# EAGLE board SD_MMC Breakout-Panel-v21 (EAGLE 6.5.0)
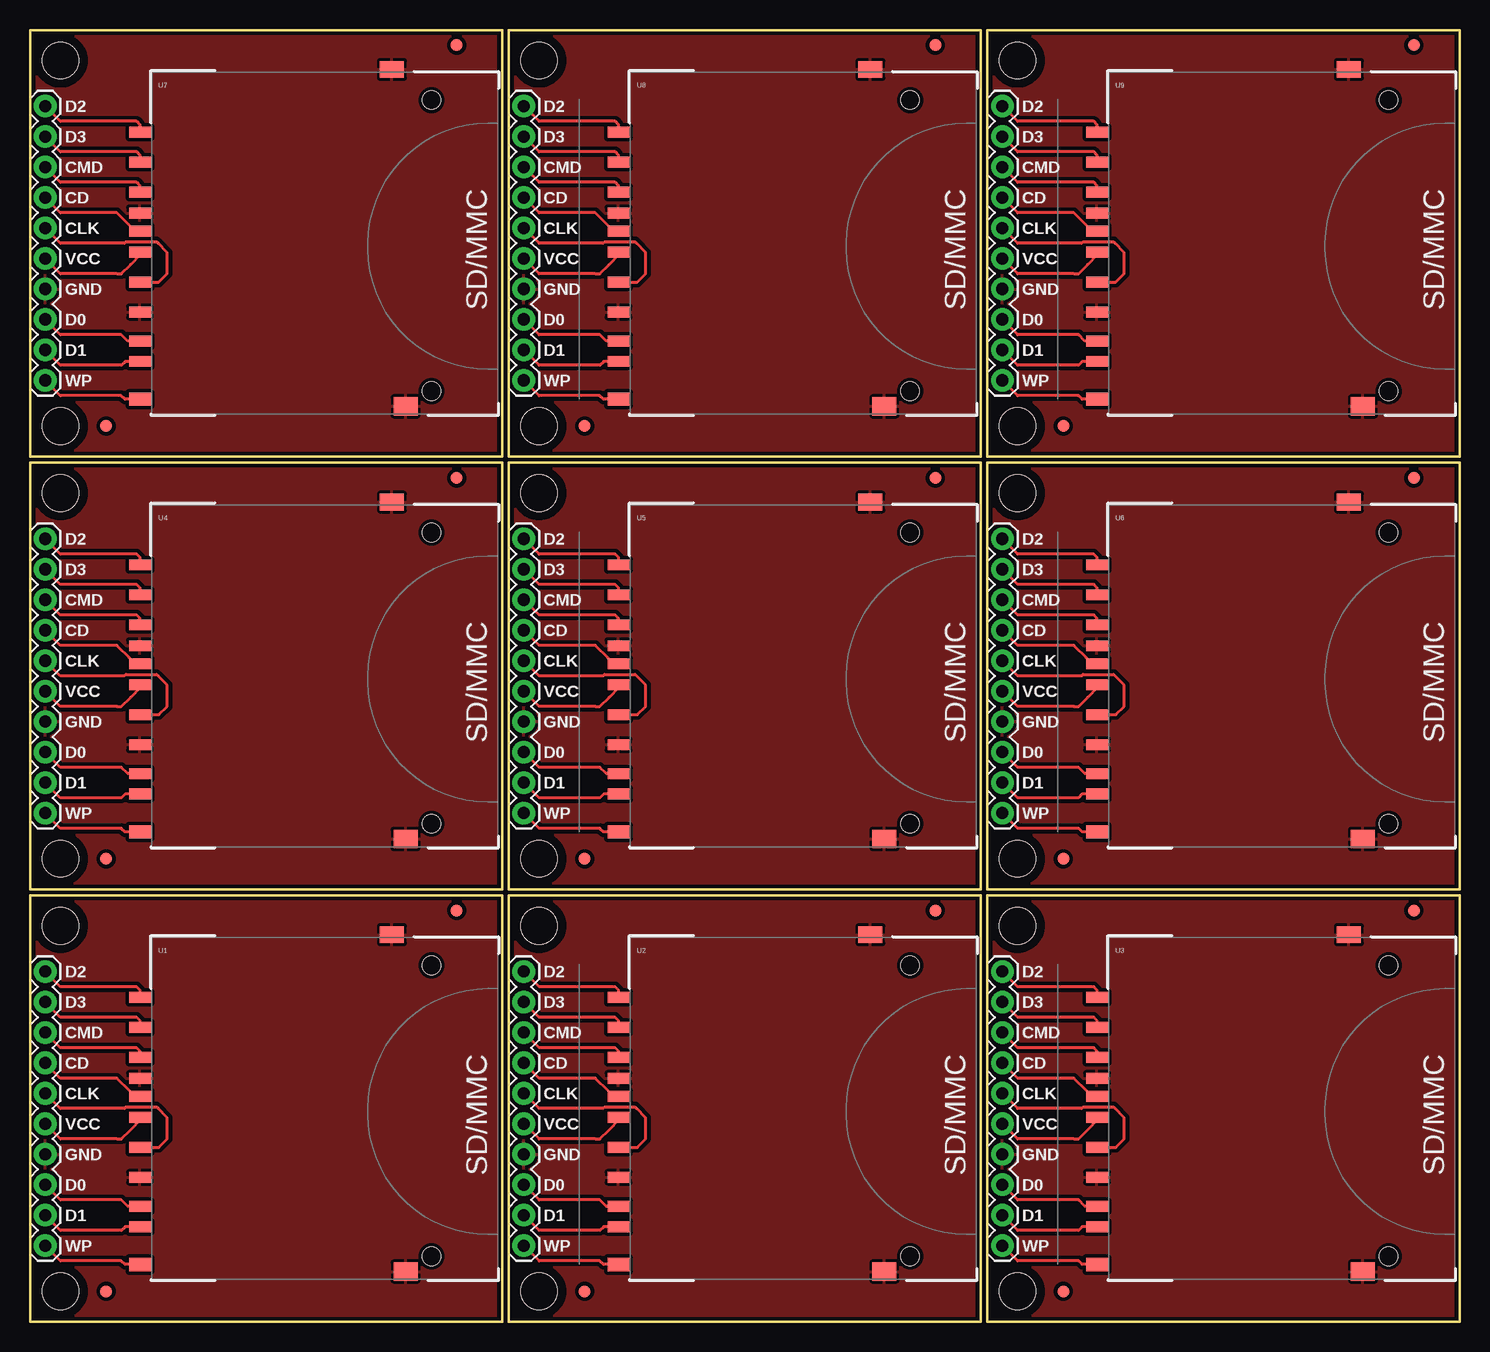
[diagram p0: board, top side]
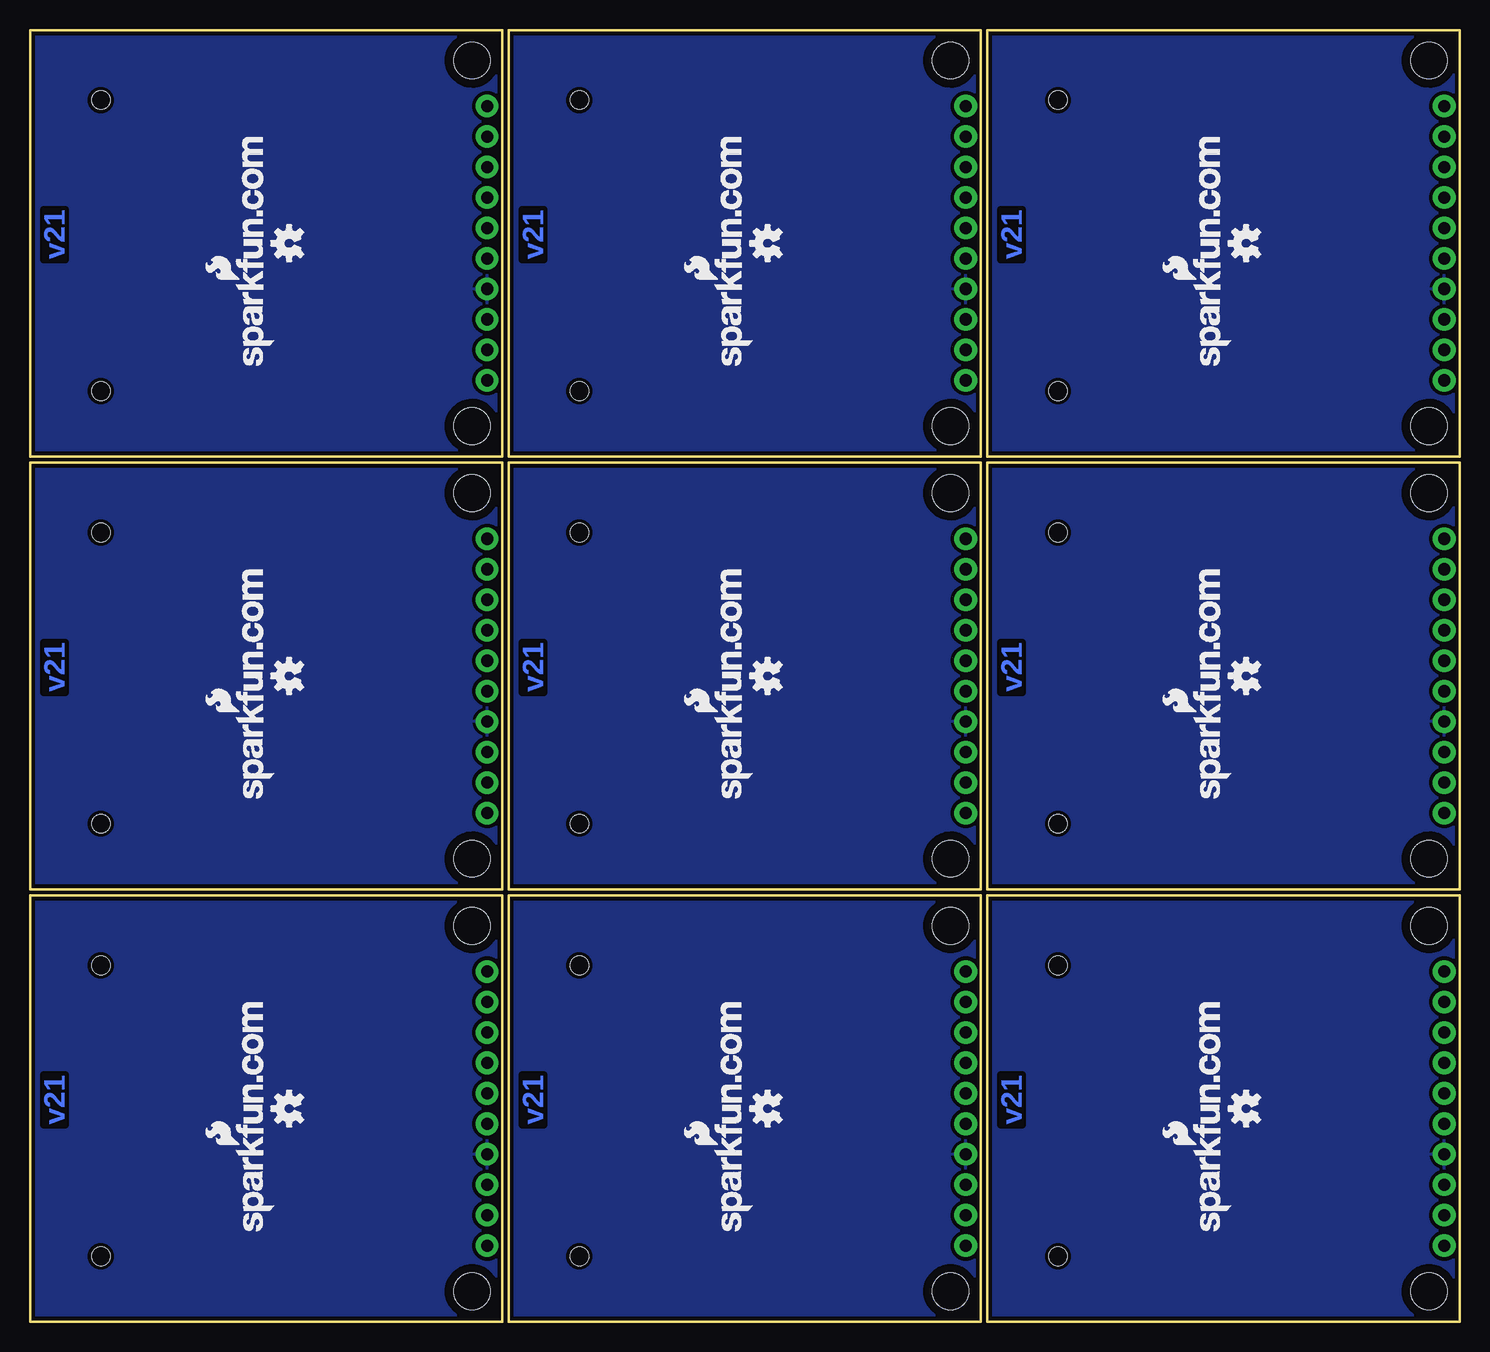
[diagram p1: board, bottom side, seen from below]

Size 119.13 x 107.7 mm. Coordinates in mm from the lower left corner, seen from the top.
Outline: 0,0 39.37,0 39.37,35.56 0,35.56 0,0
Outline: 39.88,0 79.25,0 79.25,35.56 39.88,35.56 39.88,0
Outline: 79.76,0 119.13,0 119.13,35.56 79.76,35.56 79.76,0
Outline: 0,36.07 39.37,36.07 39.37,71.63 0,71.63 0,36.07
Outline: 39.88,36.07 79.25,36.07 79.25,71.63 39.88,71.63 39.88,36.07
Outline: 79.76,36.07 119.13,36.07 119.13,71.63 79.76,71.63 79.76,36.07
Outline: 0,72.14 39.37,72.14 39.37,107.7 0,107.7 0,72.14
Outline: 39.88,72.14 79.25,72.14 79.25,107.7 39.88,107.7 39.88,72.14
Outline: 79.76,72.14 119.13,72.14 119.13,107.7 79.76,107.7 79.76,72.14
Copper layers (1*16): Top 0.0356mm / dielectric 1.5011mm / Bottom 0.0356mm
Design rules "default": minimum track width 8mil, minimum drill 20mil, track to track 8mil, track to pad 8mil, pad to pad 8mil, via to via 8mil, smd to smd 8mil, copper to edge 10mil, drill to drill 8mil, minimum pad ring 12mil, minimum via ring 10mil, stop-mask expansion 4mil, vias tented up to drill 20mil, thermal gap 10mil

## Footprints (pad centres in the part's own frame; a part is rotated, then mirrored left to right if it is on the bottom)
FIDUCIAL-1X2 = smd 1 x 1: 1 0,0
1X10 = drill 1.016 pad 1.88: 1 0,0; 2 2.54,0; 3 5.08,0; 4 7.62,0; 5 10.16,0; 6 12.7,0; 7 15.24,0; 8 17.78,0; 9 20.32,0; 10 22.86,0
SD_1:1 = smd 1.8 x 0.9: 1 -1,6.77; 2 -1,4.27; 3 -1,2.52; 4 -1,-0.73; 5 -1,-3.23; 6 -1,-5.73; 7 -1,-8.15; 8 -1,-9.85; 9 -1,9.27; CD -1,1.02 | smd 2 x 1.4: SH@1 20,14.496 | smd 2 x 1.527: SH@2 21.15,-13.589 | smd 1.8 x 1.1: WP -1,-13 | hole 1.55: 23.3,11.94; 23.3,-12.32
STAND-OFF-TIGHT = hole 3.048: 0,0

## Placement (x,y rotation side)
FID1  FIDUCIAL1X2  [FIDUCIAL-1X2]  6.35,2.54 0 top
FID2  FIDUCIAL1X2  [FIDUCIAL-1X2]  35.56,34.29 0 top
FID3  FIDUCIAL1X2  [FIDUCIAL-1X2]  46.23,2.54 0 top
FID4  FIDUCIAL1X2  [FIDUCIAL-1X2]  75.44,34.29 0 top
FID5  FIDUCIAL1X2  [FIDUCIAL-1X2]  86.11,2.54 0 top
FID6  FIDUCIAL1X2  [FIDUCIAL-1X2]  115.32,34.29 0 top
FID7  FIDUCIAL1X2  [FIDUCIAL-1X2]  6.35,38.61 0 top
FID8  FIDUCIAL1X2  [FIDUCIAL-1X2]  35.56,70.36 0 top
FID9  FIDUCIAL1X2  [FIDUCIAL-1X2]  46.23,38.61 0 top
FID10  FIDUCIAL1X2  [FIDUCIAL-1X2]  75.44,70.36 0 top
FID11  FIDUCIAL1X2  [FIDUCIAL-1X2]  86.11,38.61 0 top
FID12  FIDUCIAL1X2  [FIDUCIAL-1X2]  115.32,70.36 0 top
FID13  FIDUCIAL1X2  [FIDUCIAL-1X2]  6.35,74.68 0 top
FID14  FIDUCIAL1X2  [FIDUCIAL-1X2]  35.56,106.43 0 top
FID15  FIDUCIAL1X2  [FIDUCIAL-1X2]  46.23,74.68 0 top
FID16  FIDUCIAL1X2  [FIDUCIAL-1X2]  75.44,106.43 0 top
FID17  FIDUCIAL1X2  [FIDUCIAL-1X2]  86.11,74.68 0 top
FID18  FIDUCIAL1X2  [FIDUCIAL-1X2]  115.32,106.43 0 top
JP1  M10"  [1X10]  41.15,6.35 90 top
JP2  M10"  [1X10]  81.03,6.35 90 top
JP3  M10"  [1X10]  1.27,42.42 90 top
JP4  M10"  [1X10]  41.15,42.42 90 top
JP5  M10"  [1X10]  1.27,6.35 90 top
JP6  M10"  [1X10]  81.03,42.42 90 top
JP7  M10"  [1X10]  1.27,78.49 90 top
JP8  M10"  [1X10]  41.15,78.49 90 top
JP9  M10"  [1X10]  81.03,78.49 90 top
U1  SD_CARD_SOCKET  [SD_1:1]  10.16,17.78 0 top
U2  SD_CARD_SOCKET  [SD_1:1]  50.04,17.78 0 top
U3  SD_CARD_SOCKET  [SD_1:1]  89.92,17.78 0 top
U4  SD_CARD_SOCKET  [SD_1:1]  10.16,53.85 0 top
U5  SD_CARD_SOCKET  [SD_1:1]  50.04,53.85 0 top
U6  SD_CARD_SOCKET  [SD_1:1]  89.92,53.85 0 top
U7  SD_CARD_SOCKET  [SD_1:1]  10.16,89.92 0 top
U8  SD_CARD_SOCKET  [SD_1:1]  50.04,89.92 0 top
U9  SD_CARD_SOCKET  [SD_1:1]  89.92,89.92 0 top
U$1  LOGO-SFENEW  [SFE-NEW-WEBLOGO]  19.05,7.59 90 bottom
U$2  LOGO-SFENEW  [SFE-NEW-WEBLOGO]  58.93,7.59 90 bottom
U$3  OSHW-LOGOS  [OSHW-LOGO-S]  17.78,17.78 90 bottom
U$4  [STAND-OFF-TIGHT]  2.54,33.02 0 top
U$5  [STAND-OFF-TIGHT]  2.54,2.54 0 top
U$6  OSHW-LOGOS  [OSHW-LOGO-S]  57.66,17.78 90 bottom
U$7  [STAND-OFF-TIGHT]  42.42,33.02 0 top
U$8  [STAND-OFF-TIGHT]  42.42,2.54 0 top
U$9  LOGO-SFENEW  [SFE-NEW-WEBLOGO]  98.81,7.59 90 bottom
U$10  OSHW-LOGOS  [OSHW-LOGO-S]  97.54,17.78 90 bottom
U$11  [STAND-OFF-TIGHT]  82.3,33.02 0 top
U$12  [STAND-OFF-TIGHT]  82.3,2.54 0 top
U$13  LOGO-SFENEW  [SFE-NEW-WEBLOGO]  19.05,43.66 90 bottom
U$14  OSHW-LOGOS  [OSHW-LOGO-S]  17.78,53.85 90 bottom
U$15  [STAND-OFF-TIGHT]  2.54,69.09 0 top
U$16  [STAND-OFF-TIGHT]  2.54,38.61 0 top
U$17  LOGO-SFENEW  [SFE-NEW-WEBLOGO]  58.93,43.66 90 bottom
U$18  OSHW-LOGOS  [OSHW-LOGO-S]  57.66,53.85 90 bottom
U$19  [STAND-OFF-TIGHT]  42.42,69.09 0 top
U$20  [STAND-OFF-TIGHT]  42.42,38.61 0 top
U$21  LOGO-SFENEW  [SFE-NEW-WEBLOGO]  98.81,43.66 90 bottom
U$22  OSHW-LOGOS  [OSHW-LOGO-S]  97.54,53.85 90 bottom
U$23  [STAND-OFF-TIGHT]  82.3,69.09 0 top
U$24  [STAND-OFF-TIGHT]  82.3,38.61 0 top
U$25  LOGO-SFENEW  [SFE-NEW-WEBLOGO]  19.05,79.73 90 bottom
U$26  OSHW-LOGOS  [OSHW-LOGO-S]  17.78,89.92 90 bottom
U$27  [STAND-OFF-TIGHT]  2.54,105.16 0 top
U$28  [STAND-OFF-TIGHT]  2.54,74.68 0 top
U$29  LOGO-SFENEW  [SFE-NEW-WEBLOGO]  58.93,79.73 90 bottom
U$30  OSHW-LOGOS  [OSHW-LOGO-S]  57.66,89.92 90 bottom
U$31  [STAND-OFF-TIGHT]  42.42,105.16 0 top
U$32  [STAND-OFF-TIGHT]  42.42,74.68 0 top
U$33  LOGO-SFENEW  [SFE-NEW-WEBLOGO]  98.81,79.73 90 bottom
U$34  OSHW-LOGOS  [OSHW-LOGO-S]  97.54,89.92 90 bottom
U$35  [STAND-OFF-TIGHT]  82.3,105.16 0 top
U$36  [STAND-OFF-TIGHT]  82.3,74.68 0 top

## Library data of the parts
FID1-FID18 U$3 U$6 U$10 U$14 U$18 U$22 U$26 U$30 U$34 = SparkFun-Aesthetics
JP1-JP9 U1-U9 = SparkFun-Connectors
U$1 U$2 U$9 U$13 U$17 U$21 U$25 U$29 U$33 = SparkFun
U$4 U$5 U$7 U$8 U$11 U$12 U$15 U$16 U$19 U$20 U$23 U$24 U$27 U$28 U$31 U$32 U$35 U$36 = SparkFun-Electromechanical

## Nets
CD: JP5.7 U1.CD
CD1: JP1.7 U2.CD
CD2: JP2.7 U3.CD
CD3: JP3.7 U4.CD
CD4: JP4.7 U5.CD
CD5: JP6.7 U6.CD
CD6: JP7.7 U7.CD
CD7: JP8.7 U8.CD
CD8: JP9.7 U9.CD
CLK: JP5.6 U1.5
CLK1: JP1.6 U2.5
CLK2: JP2.6 U3.5
CLK3: JP3.6 U4.5
CLK4: JP4.6 U5.5
CLK5: JP6.6 U6.5
CLK6: JP7.6 U7.5
CLK7: JP8.6 U8.5
CLK8: JP9.6 U9.5
CMD: JP5.8 U1.2
CMD1: JP1.8 U2.2
CMD2: JP2.8 U3.2
CMD3: JP3.8 U4.2
CMD4: JP4.8 U5.2
CMD5: JP6.8 U6.2
CMD6: JP7.8 U7.2
CMD7: JP8.8 U8.2
CMD8: JP9.8 U9.2
D0: JP5.3 U1.7
D1: JP5.2 U1.8
D2: JP5.10 U1.9
D3: JP5.9 U1.1
D4: JP1.2 U2.8
D5: JP1.3 U2.7
D6: JP1.10 U2.9
D7: JP1.9 U2.1
D8: JP2.2 U3.8
D9: JP2.3 U3.7
D10: JP2.10 U3.9
D11: JP2.9 U3.1
D12: JP3.2 U4.8
D13: JP3.3 U4.7
D14: JP3.10 U4.9
D15: JP3.9 U4.1
D16: JP4.2 U5.8
D17: JP4.3 U5.7
D18: JP4.10 U5.9
D19: JP4.9 U5.1
D20: JP6.2 U6.8
D21: JP6.3 U6.7
D22: JP6.10 U6.9
D23: JP6.9 U6.1
D24: JP7.2 U7.8
D25: JP7.3 U7.7
D26: JP7.10 U7.9
D27: JP7.9 U7.1
D28: JP8.2 U8.8
D29: JP8.3 U8.7
D30: JP8.10 U8.9
D31: JP8.9 U8.1
D32: JP9.2 U9.8
D33: JP9.3 U9.7
D34: JP9.10 U9.9
D35: JP9.9 U9.1
GND: JP5.4 U1.3 U1.6 U1.SH@1 U1.SH@2
GND1: JP1.4 U2.3 U2.6 U2.SH@1 U2.SH@2
GND2: JP2.4 U3.3 U3.6 U3.SH@1 U3.SH@2
GND3: JP3.4 U4.3 U4.6 U4.SH@1 U4.SH@2
GND4: JP4.4 U5.3 U5.6 U5.SH@1 U5.SH@2
GND5: JP6.4 U6.3 U6.6 U6.SH@1 U6.SH@2
GND6: JP7.4 U7.3 U7.6 U7.SH@1 U7.SH@2
GND7: JP8.4 U8.3 U8.6 U8.SH@1 U8.SH@2
GND8: JP9.4 U9.3 U9.6 U9.SH@1 U9.SH@2
VCC: JP5.5 U1.4
VCC1: JP1.5 U2.4
VCC2: JP2.5 U3.4
VCC3: JP3.5 U4.4
VCC4: JP4.5 U5.4
VCC5: JP6.5 U6.4
VCC6: JP7.5 U7.4
VCC7: JP8.5 U8.4
VCC8: JP9.5 U9.4
WP: JP5.1 U1.WP
WP1: JP1.1 U2.WP
WP2: JP2.1 U3.WP
WP3: JP3.1 U4.WP
WP4: JP4.1 U5.WP
WP5: JP6.1 U6.WP
WP6: JP7.1 U7.WP
WP7: JP8.1 U8.WP
WP8: JP9.1 U9.WP

## Tracks (layer width: path | path; a pad name or v marks a point on that pad's centre or on a via)
CD
  Top 0.254: U1.CD 8.76,18.8 8.26,19.3 7.24,20.32 2.54,20.32 JP5.7
CD1
  Top 0.254: U2.CD 48.64,18.8 48.13,19.3 47.12,20.32 42.42,20.32 JP1.7
CD2
  Top 0.254: U3.CD 88.52,18.8 88.01,19.3 87,20.32 82.3,20.32 JP2.7
CD3
  Top 0.254: U4.CD 8.76,54.87 8.26,55.37 7.24,56.39 2.54,56.39 JP3.7
CD4
  Top 0.254: U5.CD 48.64,54.87 48.13,55.37 47.12,56.39 42.42,56.39 JP4.7
CD5
  Top 0.254: U6.CD 88.52,54.87 88.01,55.37 87,56.39 82.3,56.39 JP6.7
CD6
  Top 0.254: U7.CD 8.76,90.94 8.26,91.44 7.24,92.46 2.54,92.46 JP7.7
CD7
  Top 0.254: U8.CD 48.64,90.94 48.13,91.44 47.12,92.46 42.42,92.46 JP8.7
CD8
  Top 0.254: U9.CD 88.52,90.94 88.01,91.44 87,92.46 82.3,92.46 JP9.7
CLK
  Top 0.254: U1.5 10.74,14.55 11.43,15.24 11.43,17.02 10.67,17.78 10.54,17.91 8,17.91 7.87,17.78 2.54,17.78 JP5.6
CLK1
  Top 0.254: U2.5 50.62,14.55 51.31,15.24 51.31,17.02 50.55,17.78 50.42,17.91 47.88,17.91 47.75,17.78 42.42,17.78 JP1.6
CLK2
  Top 0.254: U3.5 90.5,14.55 91.19,15.24 91.19,17.02 90.42,17.78 90.3,17.91 87.76,17.91 87.63,17.78 82.3,17.78 JP2.6
CLK3
  Top 0.254: U4.5 10.74,50.62 11.43,51.31 11.43,53.09 10.67,53.85 10.54,53.98 8,53.98 7.87,53.85 2.54,53.85 JP3.6
CLK4
  Top 0.254: U5.5 50.62,50.62 51.31,51.31 51.31,53.09 50.55,53.85 50.42,53.98 47.88,53.98 47.75,53.85 42.42,53.85 JP4.6
CLK5
  Top 0.254: U6.5 90.5,50.62 91.19,51.31 91.19,53.09 90.42,53.85 90.3,53.98 87.76,53.98 87.63,53.85 82.3,53.85 JP6.6
CLK6
  Top 0.254: U7.5 10.74,86.69 11.43,87.38 11.43,89.15 10.67,89.92 10.54,90.04 8,90.04 7.87,89.92 2.54,89.92 JP7.6
CLK7
  Top 0.254: U8.5 50.62,86.69 51.31,87.38 51.31,89.15 50.55,89.92 50.42,90.04 47.88,90.04 47.75,89.92 42.42,89.92 JP8.6
CLK8
  Top 0.254: U9.5 90.5,86.69 91.19,87.38 91.19,89.15 90.42,89.92 90.3,90.04 87.76,90.04 87.63,89.92 82.3,89.92 JP9.6
CMD
  Top 0.254: U1.2 9.16,22.59 8.89,22.86 2.54,22.86 JP5.8
CMD1
  Top 0.254: U2.2 49.04,22.59 48.77,22.86 42.42,22.86 JP1.8
CMD2
  Top 0.254: U3.2 88.92,22.59 88.65,22.86 82.3,22.86 JP2.8
CMD3
  Top 0.254: U4.2 9.16,58.66 8.89,58.93 2.54,58.93 JP3.8
CMD4
  Top 0.254: U5.2 49.04,58.66 48.77,58.93 42.42,58.93 JP4.8
CMD5
  Top 0.254: U6.2 88.92,58.66 88.65,58.93 82.3,58.93 JP6.8
CMD6
  Top 0.254: U7.2 9.16,94.73 8.89,95 2.54,95 JP7.8
CMD7
  Top 0.254: U8.2 49.04,94.73 48.77,95 42.42,95 JP8.8
CMD8
  Top 0.254: U9.2 88.92,94.73 88.65,95 82.3,95 JP9.8
D0
  Top 0.254: U1.7 8.15,9.63 7.62,10.16 2.54,10.16 JP5.3
D1
  Top 0.254: U1.8 7.93,7.93 7.62,7.62 2.54,7.62 JP5.2
D2
  Top 0.254: JP5.10 2.54,27.94 8.89,27.94 9.16,27.67 U1.9
D3
  Top 0.254: JP5.9 2.54,25.4 8.89,25.4 9.16,25.13 U1.1
D4
  Top 0.254: U2.8 47.81,7.93 47.5,7.62 42.42,7.62 JP1.2
D5
  Top 0.254: U2.7 48.03,9.63 47.5,10.16 42.42,10.16 JP1.3
D6
  Top 0.254: JP1.10 42.42,27.94 48.77,27.94 49.04,27.67 U2.9
D7
  Top 0.254: JP1.9 42.42,25.4 48.77,25.4 49.04,25.13 U2.1
D8
  Top 0.254: U3.8 87.69,7.93 87.38,7.62 82.3,7.62 JP2.2
D9
  Top 0.254: U3.7 87.91,9.63 87.38,10.16 82.3,10.16 JP2.3
D10
  Top 0.254: JP2.10 82.3,27.94 88.65,27.94 88.92,27.67 U3.9
D11
  Top 0.254: JP2.9 82.3,25.4 88.65,25.4 88.92,25.13 U3.1
D12
  Top 0.254: U4.8 7.93,44 7.62,43.69 2.54,43.69 JP3.2
D13
  Top 0.254: U4.7 8.15,45.7 7.62,46.23 2.54,46.23 JP3.3
D14
  Top 0.254: JP3.10 2.54,64.01 8.89,64.01 9.16,63.74 U4.9
D15
  Top 0.254: JP3.9 2.54,61.47 8.89,61.47 9.16,61.2 U4.1
D16
  Top 0.254: U5.8 47.81,44 47.5,43.69 42.42,43.69 JP4.2
D17
  Top 0.254: U5.7 48.03,45.7 47.5,46.23 42.42,46.23 JP4.3
D18
  Top 0.254: JP4.10 42.42,64.01 48.77,64.01 49.04,63.74 U5.9
D19
  Top 0.254: JP4.9 42.42,61.47 48.77,61.47 49.04,61.2 U5.1
D20
  Top 0.254: U6.8 87.69,44 87.38,43.69 82.3,43.69 JP6.2
D21
  Top 0.254: U6.7 87.91,45.7 87.38,46.23 82.3,46.23 JP6.3
D22
  Top 0.254: JP6.10 82.3,64.01 88.65,64.01 88.92,63.74 U6.9
D23
  Top 0.254: JP6.9 82.3,61.47 88.65,61.47 88.92,61.2 U6.1
D24
  Top 0.254: U7.8 7.93,80.07 7.62,79.76 2.54,79.76 JP7.2
D25
  Top 0.254: U7.7 8.15,81.77 7.62,82.3 2.54,82.3 JP7.3
D26
  Top 0.254: JP7.10 2.54,100.08 8.89,100.08 9.16,99.81 U7.9
D27
  Top 0.254: JP7.9 2.54,97.54 8.89,97.54 9.16,97.27 U7.1
D28
  Top 0.254: U8.8 47.81,80.07 47.5,79.76 42.42,79.76 JP8.2
D29
  Top 0.254: U8.7 48.03,81.77 47.5,82.3 42.42,82.3 JP8.3
D30
  Top 0.254: JP8.10 42.42,100.08 48.77,100.08 49.04,99.81 U8.9
D31
  Top 0.254: JP8.9 42.42,97.54 48.77,97.54 49.04,97.27 U8.1
D32
  Top 0.254: U9.8 87.69,80.07 87.38,79.76 82.3,79.76 JP9.2
D33
  Top 0.254: U9.7 87.91,81.77 87.38,82.3 82.3,82.3 JP9.3
D34
  Top 0.254: JP9.10 82.3,100.08 88.65,100.08 88.92,99.81 U9.9
D35
  Top 0.254: JP9.9 82.3,97.54 88.65,97.54 88.92,97.27 U9.1
GND
  pour Bottom (isolate 0.305): 0,35.56 0,0 39.37,0 39.37,35.56
  pour Top (isolate 0.305): 0,35.56 0,0 39.37,0 39.37,35.56
GND1
  pour Bottom (isolate 0.305): 39.88,35.56 39.88,0 79.25,0 79.25,35.56
  pour Top (isolate 0.305): 39.88,35.56 39.88,0 79.25,0 79.25,35.56
GND2
  pour Bottom (isolate 0.305): 79.76,35.56 79.76,0 119.13,0 119.13,35.56
  pour Top (isolate 0.305): 79.76,35.56 79.76,0 119.13,0 119.13,35.56
GND3
  pour Bottom (isolate 0.305): 0,71.63 0,36.07 39.37,36.07 39.37,71.63
  pour Top (isolate 0.305): 0,71.63 0,36.07 39.37,36.07 39.37,71.63
GND4
  pour Bottom (isolate 0.305): 39.88,71.63 39.88,36.07 79.25,36.07 79.25,71.63
  pour Top (isolate 0.305): 39.88,71.63 39.88,36.07 79.25,36.07 79.25,71.63
GND5
  pour Bottom (isolate 0.305): 79.76,71.63 79.76,36.07 119.13,36.07 119.13,71.63
  pour Top (isolate 0.305): 79.76,71.63 79.76,36.07 119.13,36.07 119.13,71.63
GND6
  pour Bottom (isolate 0.305): 0,107.7 0,72.14 39.37,72.14 39.37,107.7
  pour Top (isolate 0.305): 0,107.7 0,72.14 39.37,72.14 39.37,107.7
GND7
  pour Bottom (isolate 0.305): 39.88,107.7 39.88,72.14 79.25,72.14 79.25,107.7
  pour Top (isolate 0.305): 39.88,107.7 39.88,72.14 79.25,72.14 79.25,107.7
GND8
  pour Bottom (isolate 0.305): 79.76,107.7 79.76,72.14 119.13,72.14 119.13,107.7
  pour Top (isolate 0.305): 79.76,107.7 79.76,72.14 119.13,72.14 119.13,107.7
VCC
  Top 0.254: U1.4 9.16,16.78 8.38,16 7.62,15.24 7.24,15.24 2.54,15.24 JP5.5
VCC1
  Top 0.254: U2.4 49.04,16.78 48.26,16 47.5,15.24 47.12,15.24 42.42,15.24 JP1.5
VCC2
  Top 0.254: U3.4 88.92,16.78 88.14,16 87.38,15.24 87,15.24 82.3,15.24 JP2.5
VCC3
  Top 0.254: U4.4 9.16,52.85 8.38,52.07 7.62,51.31 7.24,51.31 2.54,51.31 JP3.5
VCC4
  Top 0.254: U5.4 49.04,52.85 48.26,52.07 47.5,51.31 47.12,51.31 42.42,51.31 JP4.5
VCC5
  Top 0.254: U6.4 88.92,52.85 88.14,52.07 87.38,51.31 87,51.31 82.3,51.31 JP6.5
VCC6
  Top 0.254: U7.4 9.16,88.92 8.38,88.14 7.62,87.38 7.24,87.38 2.54,87.38 JP7.5
VCC7
  Top 0.254: U8.4 49.04,88.92 48.26,88.14 47.5,87.38 47.12,87.38 42.42,87.38 JP8.5
VCC8
  Top 0.254: U9.4 88.92,88.92 88.14,88.14 87.38,87.38 87,87.38 82.3,87.38 JP9.5
WP
  Top 0.254: U1.WP 7.92,4.78 7.62,5.08 2.54,5.08 JP5.1
WP1
  Top 0.254: U2.WP 47.8,4.78 47.5,5.08 42.42,5.08 JP1.1
WP2
  Top 0.254: U3.WP 87.68,4.78 87.38,5.08 82.3,5.08 JP2.1
WP3
  Top 0.254: U4.WP 7.92,40.85 7.62,41.15 2.54,41.15 JP3.1
WP4
  Top 0.254: U5.WP 47.8,40.85 47.5,41.15 42.42,41.15 JP4.1
WP5
  Top 0.254: U6.WP 87.68,40.85 87.38,41.15 82.3,41.15 JP6.1
WP6
  Top 0.254: U7.WP 7.92,76.92 7.62,77.22 2.54,77.22 JP7.1
WP7
  Top 0.254: U8.WP 47.8,76.92 47.5,77.22 42.42,77.22 JP8.1
WP8
  Top 0.254: U9.WP 87.68,76.92 87.38,77.22 82.3,77.22 JP9.1

## Text on the board
Bottom: v21 | v21 | v21 | v21 | v21 | v21 | v21 | v21 | v21
tPlace: D2 | D2 | D2 | D3 | D3 | D3 | CMD | CMD | CMD | CD | CD | CD | CLK | CLK | CLK | VCC | VCC | VCC | GND | GND | GND | SD/MMC | SD/MMC | SD/MMC | D0 | D0 | D0 | D1 | D1 | D1 | WP | WP | WP | D2 | D2 | D2 | D3 | D3 | D3 | CMD | CMD | CMD | CD | CD | CD | CLK | CLK | CLK | VCC | VCC | VCC | GND | GND | GND | SD/MMC | SD/MMC | SD/MMC | D0 | D0 | D0 | D1 | D1 | D1 | WP | WP | WP | D2 | D2 | D2 | D3 | D3 | D3 | CMD | CMD | CMD | CD | CD | CD | CLK | CLK | CLK | VCC | VCC | VCC | GND | GND | GND | SD/MMC | SD/MMC | SD/MMC | D0 | D0 | D0 | D1 | D1 | D1 | WP | WP | WP